# EAGLE board BNSK-Rambo-Converters-Device (EAGLE 9.6.2)

Size 68 x 58 mm. Coordinates in mm from the lower left corner, seen from the top.
Outline: 0,4 0,54 arc-90 4,58 64,58 arc-90 68,54 68,4 arc-90 64,0 4,0 arc-90 0,4
Copper layers (1*16): Top 0.035mm / dielectric 1.5mm / Bottom 0.035mm
Design rules "default": minimum track width 10mil, minimum drill 24mil, track to track 8mil, track to pad 8mil, pad to pad 8mil, via to via 8mil, smd to smd 8mil, copper to edge 40mil, drill to drill 8mil, minimum pad ring 10mil, minimum via ring 8mil, stop-mask expansion 4mil, vias tented up to drill 0mil, thermal gap 10mil

## Footprints (pad centres in the part's own frame; a part is rotated, then mirrored left to right if it is on the bottom)
B3F-10XX = drill 1.016 long: 1 -3.251,2.261; 2 3.251,2.261; 3 -3.251,-2.261; 4 3.251,-2.261
1206 = smd 1.6 x 1.803: A -1.422,0; C 1.422,0
1X07 = drill 1.016 long: 1 -7.62,0; 2 -5.08,0; 3 -2.54,0; 4 0,0; 5 2.54,0; 6 5.08,0; 7 7.62,0
1X09-BIG = drill 1.016 pad 1.778 octagon: 1 -10.16,0; 2 -7.62,0; 3 -5.08,0; 4 -2.54,0; 5 0,0; 6 2.54,0; 7 5.08,0; 8 7.62,0; 9 10.16,0

## Placement (x,y rotation side)
B1  [B3F-10XX]  18,11 180 top
B2  [B3F-10XX]  37,11 180 top
LED_GREEN  [1206]  26,26 180 top
LED_POWER  [1206]  59,6 180 top
LED_RED  [1206]  26,34 180 top
LED_YELLOW  [1206]  26,42 180 top
MCU_LEFT_SIDE  [1X07]  51,26 0 top
MCU_RIGHT_SIDE  [1X07]  51,40.5 0 top
R_ARRAY_8  [1X09-BIG]  10,32 90 top

## Library data of the parts
B1 B2 = switch-omron; MPN: B3F-1000; OC_FARNELL: 176432; OC_NEWARK: 36M3542
LED_GREEN LED_POWER LED_RED LED_YELLOW R_ARRAY_8 = adafruit
MCU_LEFT_SIDE MCU_RIGHT_SIDE = pinhead

## Nets
GND: MCU_LEFT_SIDE.6 R_ARRAY_8.1
MCU_D0: LED_GREEN.A MCU_RIGHT_SIDE.1
MCU_D1: LED_RED.A MCU_RIGHT_SIDE.2
MCU_D2: LED_YELLOW.A MCU_RIGHT_SIDE.3
MCU_D3: B1.1 MCU_RIGHT_SIDE.4
MCU_D4: B2.1 MCU_RIGHT_SIDE.5
MCU_D5: MCU_RIGHT_SIDE.6
MCU_D6: MCU_RIGHT_SIDE.7
MCU_D7: MCU_LEFT_SIDE.1
MCU_D8: MCU_LEFT_SIDE.2
MCU_D9: MCU_LEFT_SIDE.3
MCU_D10: MCU_LEFT_SIDE.4
MCU_VCC_5V: MCU_LEFT_SIDE.7
RA_1: LED_POWER.C R_ARRAY_8.2
RA_2: LED_GREEN.C R_ARRAY_8.3
RA_3: LED_RED.C R_ARRAY_8.4
RA_4: LED_YELLOW.C R_ARRAY_8.5
RA_5: B1.4 R_ARRAY_8.6
RA_6: B2.4 R_ARRAY_8.7
VCC_33: LED_POWER.A MCU_LEFT_SIDE.5

## Tracks (layer width: path | path; a pad name or v marks a point on that pad's centre or on a via)
GND  (1 unrouted)
MCU_D0  (1 unrouted)
MCU_D1  (1 unrouted)
MCU_D2  (1 unrouted)
MCU_D3  (1 unrouted)
MCU_D4  (1 unrouted)
RA_1  (1 unrouted)
RA_2  (1 unrouted)
RA_3  (1 unrouted)
RA_4  (1 unrouted)
RA_5  (1 unrouted)
RA_6  (1 unrouted)
VCC_33  (1 unrouted)

## Text on the board
tNames: BNSK - RAMBO / Converters Automation Device | + | + | + | GND | GND | +
bNames: https://bit.ly/36Fu0YN | www.FredericTorres.com | MadeInTheUSB.net | PCBv3 - 2019.12 - Fixed